# EAGLE board Power Circuit design for JTL (EAGLE 9.3.0)
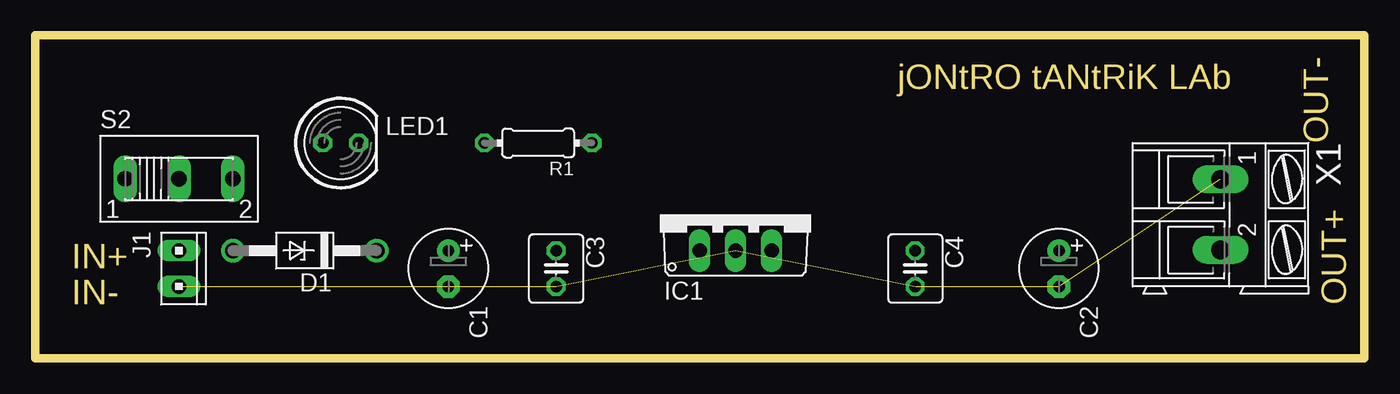
[diagram p0: board, top side]
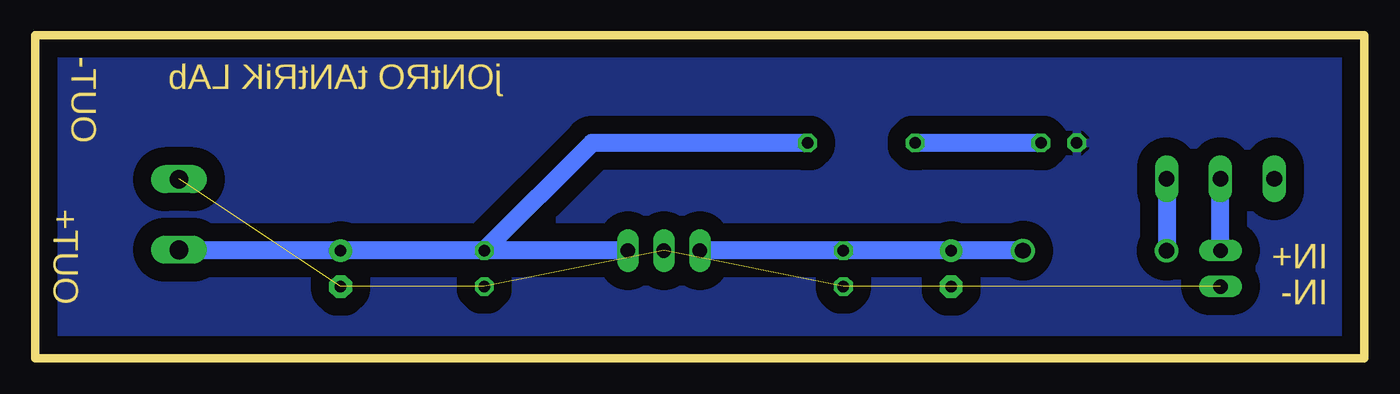
[diagram p1: board, bottom side, seen from below]

Size 93.98 x 22.86 mm. Coordinates in mm from the lower left corner, seen from the top.
Outline: 0,22.86 93.98,22.86 93.98,0 0,0 0,22.86
Copper layers (1*16): Top 0.035mm / dielectric 1.5mm / Bottom 0.035mm
Design rules "default": minimum track width 6mil, minimum drill 0.35mm, track to track 6mil, track to pad 6mil, pad to pad 6mil, via to via 6mil, smd to smd 6mil, copper to edge 40mil, drill to drill 6mil, minimum pad ring 10mil, minimum via ring 8mil, stop-mask expansion 4mil, vias tented up to drill 0mil, thermal gap 10mil

## Footprints (pad centres in the part's own frame; a part is rotated, then mirrored left to right if it is on the bottom)
E2,5-6 = drill 0.813 pad 1.6: + -1.27,0 | drill 0.813 pad 1.6 octagon: - 1.27,0
C025-040X050 = drill 0.813 octagon: 1 -1.27,0; 2 1.27,0
DO41Z10 = drill 1.118: A 5.08,0; C -5.08,0
TO220V = drill 1.016 long: 1 -2.54,-2.54; 2 0,-2.54; 3 2.54,-2.54
10X02MTA = drill 1.016 long: 1 1.27,0; 2 -1.27,0
LED5MM = drill 0.813 octagon: A -1.27,0; K 1.27,0
0204/7 = drill 0.813 octagon: 1 -3.81,0; 2 3.81,0
255SB = drill 1.118 long: 1 -3.81,0; 2 0,0; 3 3.81,0
AK300/2 = drill 1.321 long: 1 -2.515,0; 2 2.489,0

## Placement (x,y rotation side)
C1  [E2,5-6]  29.21,6.35 270 top
C2  [E2,5-6]  72.39,6.35 270 top
C3  [C025-040X050]  36.83,6.35 270 top
C4  [C025-040X050]  62.23,6.35 270 top
D1  1N4728  [DO41Z10]  19.05,7.62 180 top
IC1  7805TV  [TO220V]  49.53,10.16 0 top
J1  [10X02MTA]  10.16,6.35 270 top
LED1  [LED5MM]  21.59,15.24 0 top
R1  [0204/7]  35.56,15.24 180 top
S2  [255SB]  10.16,12.7 0 top
X1  [AK300/2]  83.82,10.16 270 top

## Library data of the parts
C1-C4 = rcl; SPICEPREFIX: C
D1 = diode
IC1 = linear
J1 = con-amp
LED1 = led
R1 = rcl; SPICEPREFIX: R
S2 = switch
X1 = con-ptr500; OC_FARNELL: unknown; OC_NEWARK: unknown

## Nets
GND: LED1.A
N$1: C1.+ C3.1 D1.C IC1.1
N$2: C1.- C2.- C3.2 C4.2 IC1.2 J1.1 X1.1
N$3: C2.+ C4.1 IC1.3 R1.1 X1.2
N$4: D1.A S2.3
N$5: J1.2 S2.2
N$6: LED1.K R1.2

## Tracks (layer width: path | path; a pad name or v marks a point on that pad's centre or on a via)
GND
  pour Bottom (isolate 1.27): 1.27,24.13 95.25,24.13 95.25,-1.27 1.27,-1.27
N$1
  Bottom 1.27: D1.C C1.+ C3.1 IC1.1
N$2  (6 unrouted)
N$3
  Bottom 1.27: R1.1 54.61,15.24 C4.1 | IC1.3 C4.1 | C4.1 C2.+ 72.44,7.67 X1.2
N$4
  Bottom 1.27: S2.3 D1.A
N$5
  Bottom 1.27: J1.2 S2.2
N$6
  Bottom 1.27: LED1.K R1.2

## Text on the board
Dimension: jONtRO tANtRiK LAb | OUT- | IN+ | IN- | OUT+